# EAGLE board solenoid (EAGLE 9.2.2)
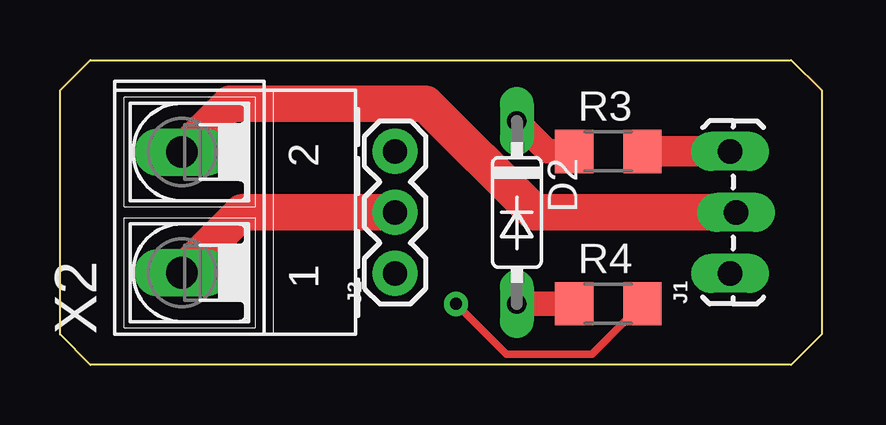
[diagram p0: board, top side]
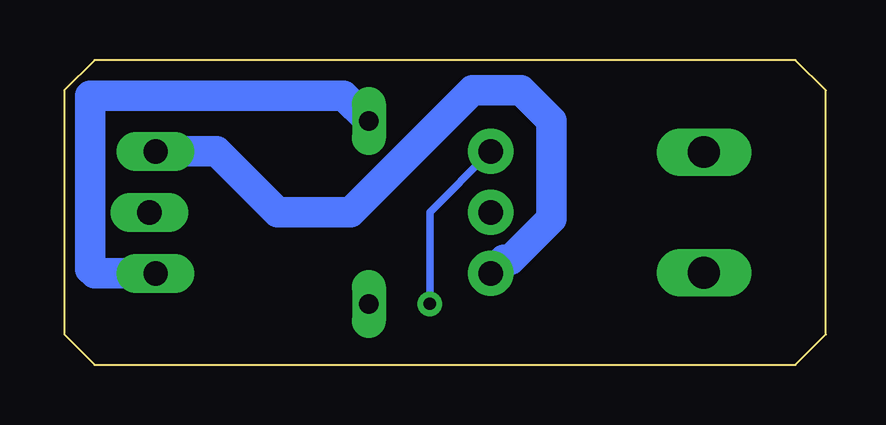
[diagram p1: board, bottom side, seen from below]

Size 31.75 x 12.7 mm. Coordinates in mm from the lower left corner, seen from the top.
Outline: 1.27,0 0,1.27 0,11.43 1.27,12.7 30.48,12.7 31.75,11.43 31.75,1.27 30.48,0 1.27,0
Copper layers (1*16): Top 0.035mm / dielectric 1.5mm / Bottom 0.035mm
Design rules "SparkFun": minimum track width 8mil, minimum drill 20mil, track to track 8mil, track to pad 8mil, pad to pad 8mil, via to via 8mil, smd to smd 8mil, copper to edge 10mil, drill to drill 8mil, minimum pad ring 12mil, minimum via ring 10mil, stop-mask expansion 4mil, vias tented up to drill 25mil, thermal gap 10mil
Net classes: 0 kick: width 0.254 mm, clearance 0.152 mm; 1 gnd: width 1.27 mm, clearance 0.305 mm; 2 12v: width 1.524 mm, clearance 0.406 mm; 3 drain: width 1.524 mm

## Footprints (pad centres in the part's own frame; a part is rotated, then mirrored left to right if it is on the bottom)
DO35-7 = drill 0.813 long: A 3.81,0; C -3.81,0
1X03_LOCK_LONGPADS = drill 1.016 long: 1 0,0; 2 2.54,-0.254; 3 5.08,0
1X03 = drill 1.016 pad 1.88: 1 0,0; 2 2.54,0; 3 5.08,0
R1206 = smd 1.6 x 1.803: 1 -1.422,0; 2 1.422,0
AK500/2-H = drill 1.321 long: 1 -2.515,0; 2 2.515,0

## Placement (x,y rotation side)
D2  1N4148  [DO35-7]  19.05,6.35 270 top
J1  stp16nf06  [1X03_LOCK_LONGPADS]  27.94,3.81 90 top
J2  [1X03]  13.97,3.81 90 top
R3  10k  [R1206]  22.86,8.89 0 top
R4  100  [R1206]  22.86,2.54 0 top
X2  [AK500/2-H]  5.08,6.35 90 top

## Library data of the parts
D2 = diode
J1 J2 = SparkFun-Connectors
R3 R4 = eagle-ltspice; SPICEMODEL: NONE; SPICEPREFIX: R
X2 = con-ptr500; OC_FARNELL: unknown; OC_NEWARK: unknown

## Nets
12V [12v]: J2.2 X2.1
DRAIN [drain]: J1.2 X2.2
GND [gnd]: J1.3 J2.1 R3.2
KICK: J2.3 R4.2
N$4: D2.C J1.1 R3.1
N$5: D2.A R4.1

## Tracks (layer width: path | path; a pad name or v marks a point on that pad's centre or on a via)
12V
  Top 1.524: X2.1 7.59,6.35 J2.2
DRAIN
  Top 1.524: X2.2 7.1,10.88 15.24,10.88 19.77,6.35 J1.2
GND
  Top 1.27: R3.2 J1.3
  Bottom 1.27: J2.1 13.41,4.37 13.15,4.37 11.43,6.09 11.43,10.16 12.7,11.43 14.73,11.43 19.81,6.35 22.86,6.35 25.4,8.89 J1.3
KICK  (via drill 0.51)
  Top 0.305: R4.2 22.19,0.45 18.61,0.45 v16.51,2.54
  Bottom 0.305: J2.3 16.51,6.35 v16.51,2.54
N$4
  Top 1.016: R3.1 20.32,8.89 D2.C
  Bottom 1.27: J1.1 30.48,3.81 30.66,3.99 30.66,11.21 20.1,11.21 D2.C
N$5
  Top 1.016: R4.1 D2.A